# Altium PCB PCB1.PcbDoc (part 3 of 3)
Units mm, origin at the board's own origin, x right, y up, seen from the top; angles counter-clockwise.
Board outline 312.67 x 198.63 mm, 2 copper layers (Top Layer, Bottom Layer); 142 components, 324 nets, 969 pads, 386 vias.
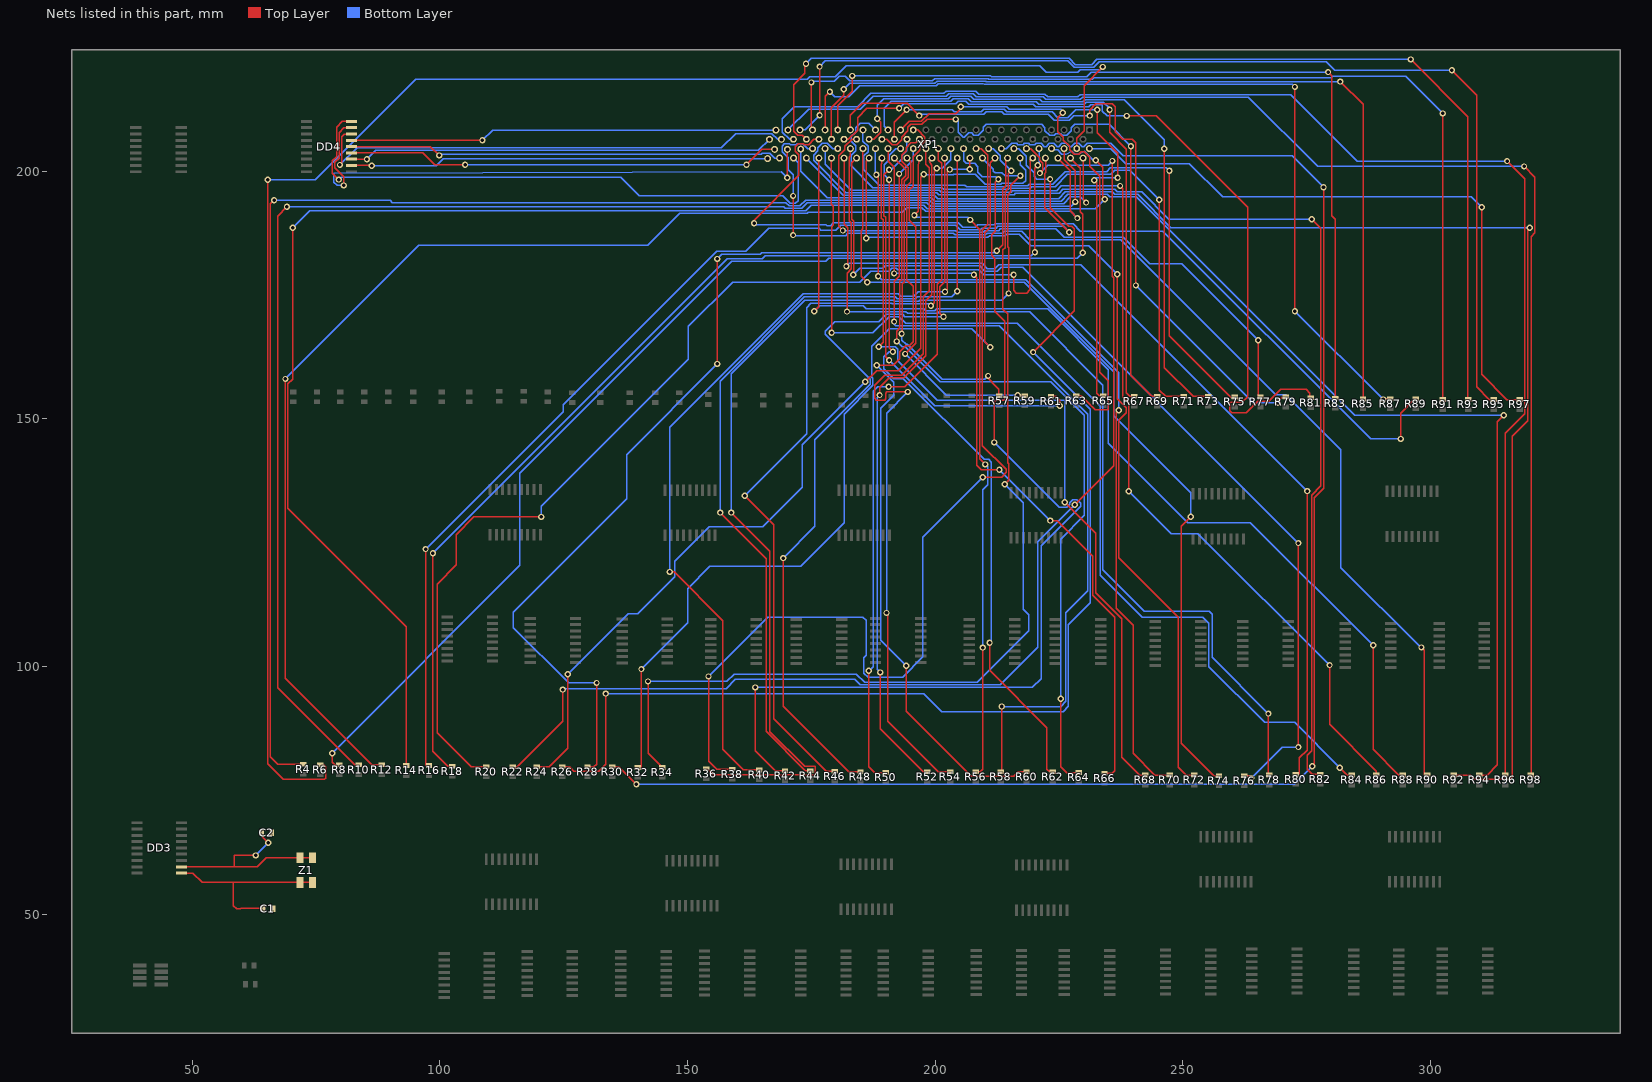
[diagram p3: the nets of this part, all layers, seen from the top]

## Via types
v1: diameter 1.27, hole 0.711, Top Layer to Bottom Layer, 386 vias

## Nets (pads, with @x,y where several pads share a name; then routed paths per layer and width w, separated by ;. In a path a pad name is that pad's centre, name@x,y a point inside that pad or via, vN(x,y) a via of type N, cw(c..) or ccw(c..) an arc to the next point about the centre after c; other vN are vias at no path point) (continued)
XP1-28: R57.2 XP1.28 | length 70.5
  Top Layer w0.254: v1(193.218,167.183) 193.391,167.356 193.391,177.305 193.714,177.628 193.714,197.938 194.556,198.78 194.556,200.677 193.218,202.016 193.218,203.225 194.107,204.114 194.107,204.749 195.09,205.733 196.107,205.733 XP1.28@196.837,206.462 ; v1(210.668,158.674) 210.16,158.674 212.801,156.032 212.801,154.67 R57.2@212.976,154.67
  Bottom Layer w0.254: v1(193.218,167.183) 193.218,165.927 194.109,165.036 194.377,165.036 201.422,157.991 209.985,157.991 v1(210.668,158.674)
XP1-29: R59.2 XP1.29 | length 77.1
  Top Layer w0.254: v1(193.925,163.116) 196.08,165.272 196.08,188.832 194.791,190.121 194.791,196.229 195.568,197.006 195.568,202.907 196.875,204.214 196.875,204.978 197.914,206.016 197.914,206.908 196.455,208.367 XP1.29@195.567,208.367 ; v1(216.687,154.788) 216.805,154.67 R59.2@218.056,154.67
  Bottom Layer w0.254: v1(193.925,163.116) 202.254,154.788 v1(216.687,154.788)
XP1-30: R61.2 XP1.30 | length 88.8
  Top Layer w0.254: v1(190.678,161.823) 189.992,162.509 189.992,190.729 189.662,191.059 189.662,199.314 v1(190.678,200.33) ; R61.2@223.39,154.543 224.358,154.543 225.171,153.73 v1(225.171,152.629)
  Bottom Layer w0.254: v1(190.678,161.823) 199.873,152.629 v1(225.171,152.629) ; v1(190.678,200.33) 191.16,200.33 193.22,202.389 193.22,203.098 194.297,204.175 XP1.30@194.297,206.462
XP1-31: R63.2 XP1.31 | length 109.8
  Top Layer w0.254: XP1.31@193.027,208.367 194.72,210.061 197.208,210.061 198.771,211.623 204.156,211.623 205.181,212.649 v1(205.181,213.033) ; v1(225.781,211.836) 224.765,210.82 224.765,207.997 225.854,206.908 225.854,206.273 227.124,205.003 227.124,204.368 228.078,203.414 228.966,203.414 229.515,203.962 230.073,203.962 231.214,202.821 231.214,200.988 233.197,199.005 233.197,159.436 234.975,157.658 234.975,151.816 232.343,151.816 229.489,154.67 R63.2@228.47,154.67
  Bottom Layer w0.254: v1(205.181,213.033) 214.411,213.033 214.941,212.504 225.327,212.504 225.781,212.05 v1(225.781,211.836)
XP1-32: R65.2 XP1.32 | length 112.2
  Top Layer w0.254: XP1.32@191.757,206.462 191.757,209.93 v1(194.222,212.395) ; v1(232.136,198.202) 232.664,197.674 232.664,155.178 233.172,154.67 R65.2@233.931,154.67 ; v1(232.715,212.395) 232.715,207.747 236.83,203.632 v1(236.83,198.679)
  Bottom Layer w0.254: v1(194.222,212.395) 203.406,212.395 203.821,211.98 209.306,211.98 209.855,212.529 213.907,212.529 214.437,211.999 223.593,211.999 224.769,210.824 226.793,210.824 228.363,212.395 v1(232.715,212.395) ; v1(232.136,198.202) 232.613,198.679 v1(236.83,198.679)
XP1-33: R67.2 XP1.33 | length 112.9
  Top Layer w0.254: v1(235.204,212.42) 235.204,207.831 238.574,204.46 238.574,155.237 239.268,154.543 R67.2@240.154,154.543
  Bottom Layer w0.254: XP1.33@190.487,208.367 189.717,209.137 189.717,212.75 191.109,214.143 203.135,214.143 203.665,214.673 206.697,214.673 207.31,214.06 220.41,214.06 220.958,213.512 230.062,213.512 230.511,213.96 233.965,213.96 235.204,212.721 v1(235.204,212.42)
XP1-34: R69.2 XP1.34 | length 116
  Top Layer w0.254: XP1.34@189.217,206.462 190.233,206.462 191.31,205.385 192.203,205.385 193.22,206.402 193.22,206.908 194.49,208.178 194.49,208.862 195.072,209.444 197.328,209.444 198.349,210.464 v1(204.165,210.464) ; v1(239.522,205.029) 239.522,158.775 243.754,154.543 R69.2@244.853,154.543
  Bottom Layer w0.254: v1(204.165,210.464) 204.65,209.98 204.65,207.921 205.687,206.883 205.894,206.883 206.783,207.772 207.338,207.772 207.82,207.29 208.713,207.29 209.728,208.305 209.728,208.864 210.312,209.448 221.488,209.448 222.148,208.788 222.148,208.202 223.127,207.224 224.015,207.224 224.33,207.539 225.351,207.539 225.667,207.224 226.555,207.224 227.51,208.178 227.51,208.813 228.14,209.444 235.107,209.444 v1(239.522,205.029)
XP1-35: R71.2 XP1.35 | length 125.9
  Top Layer w0.254: v1(245.262,194.234) 245.262,155.804 246.523,154.543 R71.2@250.187,154.543
  Bottom Layer w0.254: XP1.35@187.947,208.367 186.586,209.728 184.883,209.728 183.944,208.788 183.944,207.921 183.06,207.037 183.06,206.016 183.944,205.132 183.944,204.111 183.058,203.225 183.058,201.066 187.441,196.683 201.352,196.683 201.681,196.354 214.796,196.354 215.025,196.582 219.241,196.582 219.542,196.884 224.204,196.884 226.714,199.394 235.419,199.394 236.224,200.199 239.297,200.199 v1(245.262,194.234)
XP1-36: R73.2 XP1.36 | length 128.7
  Top Layer w0.254: XP1.36@186.677,206.462 187.565,206.462 189.024,207.921 189.024,209.883 v1(188.29,210.617) ; v1(246.278,204.521) 246.278,160.35 252.086,154.543 R73.2@255.14,154.543
  Bottom Layer w0.254: v1(188.29,210.617) 188.29,213.36 189.599,214.669 202.653,214.669 203.161,215.177 207.201,215.177 207.814,214.564 221.116,214.564 221.664,214.016 229.812,214.016 230.26,214.464 238.149,214.464 246.278,206.334 v1(246.278,204.521)
XP1-37: R75.2 XP1.37 | length 125.5
  Top Layer w0.254: v1(247.294,200.101) 247.294,166.802 259.68,154.416 R75.2@260.474,154.416
  Bottom Layer w0.254: XP1.37@185.407,208.367 185.407,206.08 186.484,205.003 186.484,203.982 185.6,203.098 185.6,200.277 188.671,197.206 205.977,197.206 206.324,196.858 214.185,196.858 214.413,197.087 218.737,197.087 219.038,197.388 223.7,197.388 226.261,199.949 234.638,199.949 235.392,200.703 246.693,200.703 v1(247.294,200.101)
XP1-38: R77.2 XP1.38 | length 126.3
  Top Layer w0.254: v1(181.381,188.036) 180.52,188.898 180.52,203.098 181.788,204.366 181.788,205.001 183.248,206.462 XP1.38@184.137,206.462 ; v1(265.227,165.862) 265.227,154.416 R77.2@265.681,154.416
  Bottom Layer w0.254: v1(181.381,188.036) 181.393,188.024 204.191,188.024 204.57,187.646 209.618,187.646 209.997,188.024 212.852,188.024 213.172,188.344 224.38,188.344 226.041,186.684 237.928,186.684 243.281,181.331 249.758,181.331 v1(265.227,165.862)
XP1-39: R79.2 XP1.39 | length 141.4
  Top Layer w0.254: XP1.39@182.867,208.367 182.867,211.34 185.242,213.716 194.335,213.716 v1(196.799,211.252) ; v1(231.191,211.252) 231.191,212.344 232.461,213.614 235.712,213.614 236.351,212.975 236.351,208.005 237.848,206.508 239.776,206.508 240.538,205.746 v1(240.538,176.936) ; v1(269.215,153.238) 269.215,153.629 270.002,154.416 R79.2@270.761,154.416
  Bottom Layer w0.254: v1(196.799,211.252) 197.024,211.476 209.81,211.476 210.359,212.025 213.403,212.025 213.933,211.495 222.855,211.495 224.03,210.32 227.051,210.32 227.982,211.252 v1(231.191,211.252) ; v1(240.538,176.936) 264.236,153.238 v1(269.215,153.238)
XP1-40: R81.2 XP1.40 | length 160
  Top Layer w0.254: XP1.40@181.597,206.462 182.485,206.462 184.33,208.307 184.33,210.82 186.209,212.7 v1(192.71,212.7) ; v1(238.684,211.176) 244.678,211.176 263.119,192.735 263.119,154.508 261.925,153.314 259.436,153.314 259.436,151.613 259.842,151.206 262.788,151.206 265.125,153.543 267.335,153.543 269.748,155.956 274.879,155.956 275.666,155.169 275.666,154.289 R81.2@275.841,154.289
  Bottom Layer w0.254: v1(192.71,212.7) 193.649,213.639 204.169,213.639 204.699,214.169 206.193,214.169 206.806,213.556 219.762,213.556 220.311,213.008 231.015,213.008 231.418,213.411 233.655,213.411 233.727,213.339 233.727,212.145 234.696,211.176 v1(238.684,211.176)
XP1-41: R83.2 XP1.41 | length 175.1
  Top Layer w0.254: XP1.41@180.327,208.367 180.327,213.27 183.236,216.179 v1(183.236,219.253) ; v1(279.333,220.031) 280.086,219.278 280.086,191.008 280.822,190.271 280.822,154.162 R83.2@280.81,154.162
  Bottom Layer w0.254: v1(183.236,219.253) 211.19,219.253 211.338,219.104 230.632,219.104 231.558,220.031 v1(279.333,220.031)
XP1-42: R85.2 XP1.42 | length 178.1
  Top Layer w0.254: XP1.42@179.057,206.462 179.057,212.85 181.559,215.352 v1(181.559,216.586) ; v1(281.762,218.11) 286.385,213.487 286.385,154.035 R85.2@286.382,154.035
  Bottom Layer w0.254: v1(181.559,216.586) 182.71,217.737 199.957,217.737 200.422,218.201 210.226,218.201 210.33,218.096 232.199,218.096 232.212,218.11 v1(281.762,218.11)
XP1-43: R87.2 XP1.43 | length 175.7
  Top Layer w0.254: XP1.43@177.787,208.367 177.787,215.129 v1(178.74,216.082) ; v1(272.644,171.755) v1(272.644,217.018) ; v1(290.474,153.924) 290.585,154.035 R87.2@291.843,154.035
  Bottom Layer w0.254: v1(178.74,216.082) 179.756,215.066 182.571,215.066 184.738,217.233 200.176,217.233 200.641,217.697 209.722,217.697 209.867,217.552 272.109,217.552 v1(272.644,217.018) ; v1(272.644,171.755) v1(290.474,153.924)
XP1-44: R89.2 XP1.44 | length 184.1
  Top Layer w0.254: v1(163.424,189.484) 163.424,190.09 172.491,199.157 172.491,203.304 171.78,204.016 171.78,204.959 172.36,205.539 173.376,205.539 173.53,205.385 174.423,205.385 175.5,206.462 XP1.44@176.517,206.462 ; v1(294.005,145.948) 294.005,151.165 296.875,154.035 R89.2@297.05,154.035
  Bottom Layer w0.254: v1(163.424,189.484) 163.703,189.205 177.932,189.205 178.161,188.976 178.864,188.976 179.447,189.559 204.665,189.559 205.57,188.654 208.101,188.654 208.602,189.155 211.901,189.155 212.098,189.352 227.843,189.352 229.286,187.909 245.948,187.909 287.909,145.948 v1(294.005,145.948)
XP1-45: R91.2 XP1.45 | length 199.4
  Top Layer w0.254: v1(175.006,217.932) 174.981,217.907 174.981,208.633 XP1.45@175.247,208.367 ; v1(302.489,211.684) 302.489,153.908 R91.2@302.511,153.908
  Bottom Layer w0.254: v1(175.006,217.932) 175.232,218.158 179.588,218.158 180.588,219.157 181.864,219.157 182.78,218.241 199.453,218.241 199.918,218.705 210.73,218.705 210.834,218.6 231.695,218.6 232.021,218.927 279.929,218.927 280.154,219.151 295.021,219.151 v1(302.489,211.684)
XP1-46: R93.2 XP1.46 | length 215
  Top Layer w0.254: v1(173.914,221.717) 173.707,221.717 173.707,219.757 171.425,217.475 171.425,208.126 172.26,207.29 173.149,207.29 XP1.46@173.977,206.462 ; v1(296.045,222.572) 307.569,211.049 307.569,153.908 R93.2@307.591,153.908
  Bottom Layer w0.254: v1(173.914,221.717) 174.99,222.793 227.066,222.793 228.317,221.543 231.611,221.543 232.641,222.572 v1(296.045,222.572)
XP1-47: R95.2 XP1.47 | length 215.3
  Top Layer w0.254: v1(176.657,211.301) v1(176.657,221.132) ; v1(304.343,220.37) 309.321,215.392 309.321,156.489 311.903,153.908 R95.2@312.798,153.908
  Bottom Layer w0.254: XP1.47@172.707,208.367 173.723,208.367 v1(176.657,211.301) ; v1(176.657,221.132) 177.814,222.289 226.8,222.289 228.05,221.039 232.062,221.039 233.092,222.068 278.982,222.068 280.68,220.37 v1(304.343,220.37)
XP1-48: R97.2 XP1.49 | length 127.6
  Top Layer w0.254: v1(310.337,192.735) 310.337,158.988 315.417,153.908 R97.2@318.005,153.908
  Bottom Layer w0.254: XP1.49@231.127,204.557 235.465,204.557 238.473,201.549 251.308,201.549 258.039,194.818 308.254,194.818 v1(310.337,192.735)
XP1-49: R4.2 XP1.50 | length 295.4
  Top Layer w0.254: v1(66.497,194.132) 65.761,193.396 65.761,81.764 67.261,80.264 R4.2@72.393,80.264 ; XP1.50@229.857,202.652 229.857,194.298 v1(230.471,193.684)
  Bottom Layer w0.254: v1(66.497,194.132) 89.916,194.132 90.399,193.65 169.873,193.65 170.526,192.997 172.668,192.997 173.834,194.163 198.837,194.163 199.56,193.44 225.909,193.44 227.283,194.814 229.341,194.814 v1(230.471,193.684)
XP1-50: R6.2 XP1.51 | length 332.3
  Top Layer w0.254: v1(65.253,198.298) 65.253,80.366 68.402,77.216 76.657,77.216 76.911,77.47 76.911,79.756 76.53,80.137 R6.2@75.838,80.137 ; XP1.51@228.587,204.557 228.587,206.715 230.048,208.176 230.048,217.272 v1(233.832,221.056)
  Bottom Layer w0.254: v1(65.253,198.298) 74.803,198.298 95.072,218.567 174.117,218.567 174.65,219.1 179.818,219.1 181.999,221.281 221.086,221.281 222.402,219.964 228.752,219.964 229.323,220.535 233.311,220.535 v1(233.832,221.056)
XP1-51: R8.2 XP1.52 | length 227.9
  Top Layer w0.254: v1(78.232,82.474) 78.232,80.645 78.74,80.137 R8.2@79.632,80.137 ; XP1.52@227.317,202.652 229.319,200.649 229.319,191.803 229.819,191.303 v1(229.819,183.566)
  Bottom Layer w0.254: v1(78.232,82.474) 116.154,120.396 116.154,139.04 158.928,181.813 177.931,181.813 178.521,182.403 228.656,182.403 v1(229.819,183.566)
XP1-52: R10.2 XP1.53 | length 292.8
  Top Layer w0.254: v1(69.113,192.811) 67.208,190.906 67.208,95.733 82.804,80.137 R10.2@83.569,80.137 ; XP1.53@226.047,204.557 226.047,202.343 228.295,200.095 v1(228.295,193.802)
  Bottom Layer w0.254: v1(69.113,192.811) 169.425,192.811 169.744,192.493 173.014,192.493 174.18,193.659 198.333,193.659 199.056,192.936 227.429,192.936 v1(228.295,193.802)
XP1-53: R12.2 XP1.54 | length 276
  Top Layer w0.254: v1(68.809,158.064) 68.809,97.587 86.258,80.137 R12.2@88.268,80.137 ; XP1.54@224.777,202.652 227.283,200.145 227.283,191.996 v1(228.724,190.556)
  Bottom Layer w0.254: v1(68.809,158.064) 95.758,185.014 141.935,185.014 148.407,191.485 174.121,191.485 174.326,191.69 193.326,191.69 194.287,192.651 197.325,192.651 198.083,191.893 227.387,191.893 v1(228.724,190.556)
XP1-54: R14.2 XP1.55 | length 305.1
  Top Layer w0.254: v1(70.307,188.57) 70.307,158.039 69.317,157.048 69.317,132.004 93.243,108.077 93.243,80.01 R14.2@93.221,80.01 ; v1(232.435,202.209) 233.807,200.838 233.807,194.742 v1(234.213,194.335)
  Bottom Layer w0.254: v1(70.307,188.57) 73.727,191.989 173.838,191.989 175.004,193.155 197.714,193.155 198.437,192.432 232.31,192.432 v1(234.213,194.335) ; XP1.55@223.507,204.557 223.746,204.318 224.763,204.318 225.6,203.48 226.493,203.48 227.531,204.089 228.14,203.48 229.033,203.48 230.071,204.089 231.951,202.209 v1(232.435,202.209)
XP1-55: R16.2 XP1.56 | length 220.8
  Top Layer w0.254: v1(97.104,123.717) 97.104,80.01 R16.2@97.793,80.01 ; XP1.56@222.237,202.652 222.295,202.594 222.295,199.677 222.166,199.549 222.166,192.606 v1(227.076,187.696)
  Bottom Layer w0.254: v1(97.104,123.717) 124.856,151.469 124.856,152.872 155.854,183.871 161.773,183.871 166.387,188.485 176.554,188.485 176.919,188.12 179.951,188.12 180.886,189.055 204.169,189.055 205.074,188.15 209.114,188.15 209.493,188.528 212.282,188.528 212.602,188.848 225.923,188.848 v1(227.076,187.696)
XP1-56: R18.2 XP1.57 | length 213.1
  Top Layer w0.254: v1(98.577,122.86) 98.577,82.906 101.6,79.883 R18.2@102.492,79.883 ; v1(220.142,183.642) 220.142,200.609 v1(220.726,201.193)
  Bottom Layer w0.254: v1(98.577,122.86) 158.039,182.321 165.125,182.321 165.735,182.931 219.431,182.931 v1(220.142,183.642) ; v1(220.726,201.193) 220.967,201.434 XP1.57@220.967,204.557
XP1-57: R20.2 XP1.58 | length 228.8
  Top Layer w0.254: R20.2@109.366,79.74 106.29,79.74 99.416,86.614 99.416,116.637 103.302,120.523 103.302,126.644 106.858,130.2 v1(120.472,130.2) ; v1(215.824,179.121) 215.824,175.946 216.408,175.362 218.44,175.362 219.13,176.051 219.13,196.372 219.241,196.483 219.241,201.974 219.13,202.085 XP1.58@219.697,202.652
  Bottom Layer w0.254: v1(120.472,130.2) 120.472,132.334 150.165,162.027 150.165,168.656 159.11,177.601 184.791,177.601 187.022,179.832 190.703,179.832 191.258,180.387 192.18,180.387 192.46,180.107 208.817,180.107 209.804,179.121 v1(215.824,179.121)
XP1-58: R22.2 XP1.59 | length 248.1
  Top Layer w0.254: R22.2@114.684,79.74 115.605,79.74 124.816,88.951 v1(124.816,95.352) ; XP1.59@218.427,204.557 219.315,204.557 221.16,202.712 221.16,202.206 221.738,201.627 221.738,200.224 v1(221.158,199.644) ; v1(228.194,132.639) 236.042,140.487 236.042,178.462 235.739,178.765 235.739,202.033 v1(235.788,202.082)
  Bottom Layer w0.254: v1(124.816,95.352) 125.019,95.555 157.81,95.555 159.664,97.409 183.759,97.409 184.887,96.282 213.096,96.282 220.726,103.911 220.726,125.171 v1(228.194,132.639) ; v1(221.158,199.644) 222.707,201.193 234.899,201.193 v1(235.788,202.082)
XP1-59: R24.2 XP1.60 | length 190.3
  Top Layer w0.254: R24.2@119.51,79.74 122.107,79.74 125.832,83.464 v1(125.832,98.425) ; v1(185.903,157.48) 188.163,159.741 192.557,159.741 197.104,164.287 197.104,198.806 v1(197.688,199.39)
  Bottom Layer w0.254: v1(125.832,98.425) 138.024,110.617 139.979,110.617 147.447,118.085 147.447,121.234 154.407,128.194 165.176,128.194 173.152,136.169 173.152,144.729 v1(185.903,157.48) ; v1(197.688,199.39) 197.79,199.288 203.657,199.288 203.733,199.365 208.128,199.365 210.13,197.362 213.237,197.362 213.487,197.612 217.729,197.612 218.237,198.12 218.237,200.254 217.157,201.334 XP1.60@217.157,202.652
XP1-60: R26.2 XP1.61 | length 249.7
  Top Layer w0.254: R26.2@124.717,79.74 126.178,79.74 127.051,78.867 132.08,78.867 133.452,80.239 v1(133.452,94.539) ; v1(219.761,163.5) 228.092,171.831 228.092,188.341 227.584,188.849 226.924,188.849 223.19,192.583 v1(223.19,198.425)
  Bottom Layer w0.254: v1(133.452,94.539) 197.714,94.539 201.346,90.907 225.857,90.907 226.898,91.948 226.898,108.433 231.318,112.852 231.318,151.943 v1(219.761,163.5) ; XP1.61@215.887,204.557 216.903,204.557 218.415,203.046 218.415,201.244 219.953,199.705 219.953,198.943 220.472,198.425 v1(223.19,198.425)
XP1-61: R28.2 XP1.62 | length 208.1
  Top Layer w0.254: R28.2@129.797,79.74 131.099,79.74 131.623,80.264 v1(131.623,96.672) ; v1(155.981,161.087) v1(155.981,182.296) ; v1(212.446,183.972) 213.61,185.137 213.61,196.422 214.292,197.104 214.292,201.815 214.288,201.819 214.288,202.323 XP1.62@214.617,202.652
  Bottom Layer w0.254: v1(131.623,96.672) 125.984,96.672 114.808,107.848 114.808,110.947 137.693,133.833 137.693,142.799 v1(155.981,161.087) ; v1(155.981,182.296) 156.878,183.192 164.648,183.192 164.993,183.536 212.009,183.536 v1(212.446,183.972)
XP1-62: R30.2 XP1.63 | length 334
  Top Layer w0.254: R30.2@134.75,79.74 136.144,79.74 v1(139.684,76.2) ; v1(276.123,79.858) 276.511,80.245 276.511,134.097 278.409,135.996 v1(278.409,196.774)
  Bottom Layer w0.254: v1(139.684,76.2) 272.466,76.2 v1(276.123,79.858) ; XP1.63@213.347,204.557 214.363,204.557 215.44,205.634 216.461,205.634 216.71,205.385 217.731,205.385 217.98,205.634 218.873,205.634 219.122,205.385 220.143,205.385 220.392,205.634 221.413,205.634 222.069,204.978 222.404,204.978 223.06,205.634 223.953,205.634 224.609,204.978 224.944,204.978 225.6,205.634 226.493,205.634 227.149,204.978 227.484,204.978 228.14,205.634 229.033,205.634 229.689,204.978 230.024,204.978 230.685,205.638 235.445,205.638 237.993,203.09 272.093,203.09 v1(278.409,196.774)
XP1-63: R32.2 XP1.64 | length 182.5
  Top Layer w0.254: R32.2@139.957,79.613 140.691,79.613 v1(140.691,99.492) ; v1(211.138,164.44) 210.037,165.541 210.037,187.607 211.142,188.713 211.142,201.718 XP1.64@212.077,202.652
  Bottom Layer w0.254: v1(140.691,99.492) 150.012,108.814 150.012,115.748 154.508,120.244 172.822,120.244 181.635,129.057 181.635,150.972 187.427,156.763 187.427,158.193 187.198,158.421 187.198,164.694 190.703,168.199 207.379,168.199 v1(211.138,164.44)
XP1-64: R34.2 XP1.65 | length 204.4
  Top Layer w0.254: v1(142.011,96.977) 142.011,82.509 144.907,79.613 R34.2@144.91,79.613 ; v1(214.071,136.804) 214.901,137.635 214.901,140.894 214.655,141.14 214.655,171.196 213.665,172.187 213.665,184.125 214.114,184.574 214.114,195.91 214.796,196.592 214.796,199.531 v1(215.341,200.076)
  Bottom Layer w0.254: v1(142.011,96.977) 157.937,96.977 159.41,98.45 184.063,98.45 185.727,96.786 208.52,96.786 218.923,107.188 218.923,110.414 217.78,111.557 217.78,133.096 v1(214.071,136.804) ; XP1.65@210.807,204.557 211.695,204.557 213.154,203.098 213.154,202.263 v1(215.341,200.076)
XP1-65: R36.2 XP1.66 | length 209
  Top Layer w0.254: R36.2@153.816,79.359 154,79.359 155.254,78.105 175.782,78.105 175.782,79.832 173.663,79.832 166.624,86.872 166.624,123.266 v1(158.801,131.089) ; v1(214.808,175.336) 214.808,184.541 214.618,184.73 214.618,195.168 215.3,195.85 215.3,197.143 v1(217.221,199.064)
  Bottom Layer w0.254: v1(158.801,131.089) 158.801,159.106 173.685,173.99 191.609,173.99 191.879,173.719 196.657,173.719 196.928,173.99 213.462,173.99 v1(214.808,175.336) ; XP1.66@209.537,202.652 211.76,200.429 211.76,200.028 212.09,199.698 213.476,199.698 214.11,199.064 v1(217.221,199.064)
XP1-66: R38.2 XP1.67 | length 200.4
  Top Layer w0.254: v1(154.229,97.993) 154.229,80.848 155.845,79.232 R38.2@159.007,79.232 ; XP1.67@208.267,204.557 209.283,204.557 210.638,203.202 210.638,189.321 209.533,188.216 209.533,144.62 214.372,139.78 214.372,139.192 213.407,138.227 v1(209.626,138.227)
  Bottom Layer w0.254: v1(154.229,97.993) 166.218,109.982 185.42,109.982 186.106,109.296 186.106,102.307 185.602,101.803 185.602,98.632 186.44,97.794 193.4,97.794 197.536,101.93 197.536,126.136 v1(209.626,138.227)
XP1-67: R40.2 XP1.68 | length 177.7
  Top Layer w0.254: v1(146.431,119.101) 147.269,119.101 157.099,109.271 157.099,83.271 161.265,79.105 R40.2@164.468,79.105 ; v1(201.981,175.692) 202.438,176.149 202.438,199.873 v1(202.921,200.355) ; v1(206.997,200.406) XP1.68@206.997,202.652
  Bottom Layer w0.254: v1(146.431,119.101) 146.431,148.285 173.381,175.235 192.532,175.235 193.04,174.727 195.641,174.727 196.605,175.692 v1(201.981,175.692) ; v1(202.921,200.355) 202.971,200.406 v1(206.997,200.406)
XP1-68: R42.2 XP1.69 | length 210.1
  Top Layer w0.254: v1(163.652,95.778) 163.652,82.982 167.656,78.978 R42.2@169.675,78.978 ; v1(211.938,145.237) 211.938,153.416 212.319,153.797 214.02,153.797 214.02,169.748 212.07,171.699 212.07,182.314 211.39,182.994 211.39,187.154 212.15,187.915 212.15,197.749 v1(212.776,198.374)
  Bottom Layer w0.254: v1(163.652,95.778) 219.628,95.778 221.386,97.536 221.386,124.392 229.362,132.367 229.362,132.918 228.6,133.68 227.736,133.68 227.152,133.096 227.152,132.719 226.568,132.135 225.04,132.135 v1(211.938,145.237) ; XP1.69@205.727,204.557 205.727,202.096 206.248,201.575 207.956,201.575 208.589,200.942 208.589,199.751 209.458,198.882 212.268,198.882 v1(212.776,198.374)
XP1-69: R44.2 XP1.70 | length 169.3
  Top Layer w0.254: v1(156.591,131.089) 165.887,121.793 165.887,86.893 173.803,78.978 R44.2@174.755,78.978 ; v1(204.457,175.78) XP1.70@204.457,202.652
  Bottom Layer w0.254: v1(156.591,131.089) 156.591,157.645 173.571,174.625 191.982,174.625 192.383,174.223 196.022,174.223 196.424,174.625 203.302,174.625 v1(204.457,175.78)
XP1-70: R46.2 XP1.71 | length 167.1
  Top Layer w0.254: v1(161.519,134.493) 167.361,128.651 167.361,89.448 177.958,78.851 R46.2@179.708,78.851 ; v1(199.136,172.847) 199.785,173.496 199.785,200.043 v1(200.325,200.584)
  Bottom Layer w0.254: v1(161.519,134.493) 174.037,147.011 174.037,172.482 174.91,173.355 191.235,173.355 191.375,173.215 198.768,173.215 v1(199.136,172.847) ; v1(200.325,200.584) 201.397,200.584 203.187,202.374 XP1.71@203.187,204.557
XP1-71: R48.2 XP1.72 | length 166.1
  Top Layer w0.254: v1(169.342,121.895) 169.342,91.957 182.575,78.724 R48.2@184.915,78.724 ; v1(201.676,170.612) 200.969,171.319 200.969,176.708 201.905,177.644 201.905,201.371 XP1.72@201.917,202.652
  Bottom Layer w0.254: v1(169.342,121.895) 175.717,128.27 175.717,145.767 186.919,156.968 186.919,157.988 177.8,167.107 177.8,167.665 179.73,169.596 188.589,169.596 190.156,171.163 193.404,171.163 193.904,170.663 201.625,170.663 v1(201.676,170.612)
XP1-72: R50.2 XP1.73 | length 138.3
  Top Layer w0.254: v1(186.614,99.136) 186.614,79.756 187.773,78.597 R50.2@189.995,78.597 ; v1(190.576,156.464) 193.837,156.464 200.465,163.092 200.465,177.214 201.337,178.086 201.337,201.58 200.647,202.27 XP1.73@200.647,204.557
  Bottom Layer w0.254: v1(186.614,99.136) 187.452,99.974 187.452,155.563 188.353,156.464 v1(190.576,156.464)
XP1-73: R52.2 XP1.74 | length 135.2
  Top Layer w0.254: v1(188.773,154.813) 188.773,156.337 190.735,158.299 193.656,158.299 198.124,162.767 198.124,173.868 199.28,175.025 199.28,201.236 198.772,202.048 XP1.74@199.377,202.652 ; v1(188.9,98.806) 188.9,87.436 197.612,78.724 R52.2@198.377,78.724
  Bottom Layer w0.254: v1(188.773,154.813) 188.265,154.305 188.265,99.441 v1(188.9,98.806)
XP1-74: R54.2 XP1.75 | length 150.7
  Top Layer w0.254: v1(190.17,110.82) 190.424,110.566 190.424,88.935 200.635,78.724 R54.2@203.076,78.724 ; v1(194.462,155.448) 190.26,155.448 190.006,155.194 190.006,154.022 189.785,153.801 188.138,153.801 187.761,154.178 187.761,156.746 189.822,158.807 193.251,158.807 197.62,163.175 197.62,174.698 198.776,175.855 198.776,200.732 198.107,201.402 XP1.75@198.107,204.557
  Bottom Layer w0.254: v1(190.17,110.82) 190.17,151.155 v1(194.462,155.448)
XP1-75: R56.2 XP1.76 | length 138
  Top Layer w0.254: v1(195.809,191.135) 196.576,191.903 196.576,201.224 XP1.76@196.837,202.652 ; v1(207.086,190.17) 209.017,188.239 209.017,141.91 v1(210.134,140.792) ; R56.2@208.156,78.724 209.102,78.724 209.626,79.248 v1(209.626,103.835)
  Bottom Layer w0.254: v1(195.809,191.135) 196.266,190.678 206.578,190.678 v1(207.086,190.17) ; v1(209.626,103.835) 209.626,135.687 210.642,136.703 210.642,140.284 v1(210.134,140.792)
XP1-76: R58.2 XP1.77 | length 170.3
  Top Layer w0.254: v1(191.694,169.647) 191.694,177.8 192.706,178.812 v1(192.706,199.462) ; R58.2@213.236,78.724 213.462,78.724 v1(213.462,91.923)
  Bottom Layer w0.254: v1(191.694,169.647) 191.694,169.105 192.024,168.775 212.959,168.775 230.79,150.944 230.79,115.296 226.39,110.896 226.39,92.96 225.353,91.923 v1(213.462,91.923) ; v1(192.706,199.462) 195.567,202.323 XP1.77@195.567,204.557
XP1-77: R60.2 XP1.78 | length 153
  Top Layer w0.254: v1(188.214,160.811) 191.499,160.811 192.828,162.14 192.828,163.576 194.018,164.765 194.733,164.765 195.576,165.608 195.576,176.739 194.287,178.028 194.287,196.999 195.064,197.776 195.064,201.885 XP1.78@194.297,202.652 ; v1(194.132,100.152) 194.132,90.957 207.264,77.826 215.891,77.826 216.789,78.724 R60.2@218.443,78.724
  Bottom Layer w0.254: v1(188.214,160.811) 191.592,157.433 191.592,154.813 188.976,152.197 188.976,105.308 v1(194.132,100.152)
XP1-78: R62.2 XP1.79 | length 146.3
  Top Layer w0.254: v1(190.68,198.304) 190.68,164.362 v1(191.465,163.576) ; v1(210.972,104.826) 210.972,99.263 222.571,87.665 222.571,79.248 223.095,78.724 R62.2@223.777,78.724
  Bottom Layer w0.254: v1(190.68,198.304) 189.666,199.318 189.666,201.345 190.68,202.359 190.68,203.227 192.01,204.557 XP1.79@193.027,204.557 ; v1(191.465,163.576) 190.678,163.576 189.662,162.56 189.662,160.094 191.629,158.127 193.562,158.127 209.884,141.804 210.82,141.804 211.368,141.256 211.368,105.221 v1(210.972,104.826)
XP1-79: R64.2 XP1.80 | length 159.8
  Top Layer w0.254: XP1.80@191.757,202.652 194.052,200.357 194.052,199.115 193.21,198.272 193.21,178.132 192.887,177.809 192.887,168.372 192.206,167.691 192.206,165.655 v1(192.227,165.633) ; v1(225.374,93.497) 225.374,79.791 226.568,78.597 R64.2@228.984,78.597
  Bottom Layer w0.254: v1(192.227,165.633) 193.324,164.537 193.984,164.537 201.034,157.487 223.357,157.487 230.141,150.702 230.141,130.496 225.374,125.729 v1(225.374,93.497)
XP1-80: R66.2 XP1.81 | length 159
  Top Layer w0.254: XP1.81@190.487,204.557 190.487,202.027 191.694,200.82 v1(191.694,179.375) ; v1(207.823,179.095) 208.432,178.486 208.432,140.589 209.296,139.725 v1(212.979,139.725) ; v1(223.241,129.464) 224.663,129.464 231.822,122.305 231.822,114.367 236.22,109.969 236.22,78.978 235.712,78.47 R66.2@234.191,78.47
  Bottom Layer w0.254: v1(191.694,179.375) 207.543,179.375 v1(207.823,179.095) ; v1(212.979,139.725) v1(223.241,129.464)
XP1-81: R68.2 XP1.82 | length 165
  Top Layer w0.254: v1(188.62,164.592) 189.48,165.452 189.48,190.221 189.154,190.547 189.154,201.498 189.217,201.561 XP1.82@189.217,202.652 ; v1(226.136,133.147) 232.422,126.861 232.422,114.936 237.693,109.664 237.693,81.716 241.32,78.089 R68.2@242.446,78.089
  Bottom Layer w0.254: v1(188.62,164.592) 191.973,164.592 192.481,164.084 192.481,161.747 200.453,153.776 226.056,153.776 226.187,153.645 226.187,133.198 v1(226.136,133.147)
XP1-82: R70.2 XP1.83 | length 170.3
  Top Layer w0.254: v1(188.138,199.302) 188.468,198.972 v1(188.468,178.816) ; v1(237.058,151.714) 236.546,151.202 236.546,111.713 239.979,108.28 239.979,82.458 244.348,78.089 R70.2@247.399,78.089
  Bottom Layer w0.254: XP1.83@187.947,204.557 187.947,199.493 v1(188.138,199.302) ; v1(188.468,178.816) 189.205,178.079 218.262,178.079 237.058,159.283 v1(237.058,151.714)
XP1-83: R72.2 XP1.84 | length 180.6
  Top Layer w0.254: v1(186.08,186.461) 186.08,202.056 XP1.84@186.677,202.652 ; v1(236.753,179.222) 236.753,154.043 238.578,152.218 238.578,151.201 237.05,149.673 237.05,122.004 249.094,109.961 249.094,79.642 250.647,78.089 R72.2@252.352,78.089
  Bottom Layer w0.254: v1(186.08,186.461) 186.257,186.638 210.618,186.638 210.997,187.016 214.114,187.016 214.343,187.245 216.963,187.245 219.27,184.937 231.038,184.937 v1(236.753,179.222)
XP1-84: R74.2 XP1.85 | length 177.5
  Top Layer w0.254: XP1.85@185.407,204.557 185.407,188.378 185.064,188.036 185.064,178.791 v1(186.283,177.572) ; v1(251.612,130.26) 249.682,128.329 249.682,84.541 256.261,77.962 R74.2@257.305,77.962
  Bottom Layer w0.254: v1(186.283,177.572) 218.031,177.572 236.042,159.561 236.042,150.622 251.612,135.052 v1(251.612,130.26)
XP1-85: R76.2 XP1.86 | length 193.6
  Top Layer w0.254: v1(183.439,179.121) 183.599,179.281 183.599,189.859 183.178,190.28 183.178,201.693 XP1.86@184.137,202.652 ; R76.2@262.385,77.962 263.338,77.962 v1(263.83,77.47) ; v1(273.355,83.744) v1(273.355,124.917)
  Bottom Layer w0.254: v1(183.439,179.121) 184.728,180.41 189.438,180.41 189.919,180.891 208.991,180.891 210.045,179.836 212.574,179.836 213.349,180.611 217.661,180.611 v1(273.355,124.917) ; v1(263.83,77.47) 270.104,83.744 v1(273.355,83.744)
XP1-86: R78.2 XP1.87 | length 192.1
  Top Layer w0.254: v1(182.194,171.679) 182.194,179.426 183.095,180.327 183.095,189.56 182.674,189.982 182.674,202.844 182.867,203.037 XP1.87@182.867,204.557 ; v1(267.284,90.5) 267.284,78.089 R78.2@267.465,78.089
  Bottom Layer w0.254: v1(182.194,171.679) 194.056,171.679 194.412,171.323 200.508,171.323 200.812,171.628 219.065,171.628 233.858,156.835 233.858,119.532 242.214,111.176 255.372,111.176 255.956,110.592 255.956,101.829 v1(267.284,90.5)
XP1-87: R80.2 XP1.88 | length 193.8
  Top Layer w0.254: XP1.88@181.597,202.652 181.597,189.345 182.393,188.548 182.393,181.158 v1(182.083,180.848) ; R80.2@272.799,78.216 273.551,78.216 273.551,81.549 275.107,83.105 v1(275.107,135.433)
  Bottom Layer w0.254: v1(182.083,180.848) 182.63,181.395 209.499,181.395 210.553,180.34 212.07,180.34 212.845,181.116 229.425,181.116 v1(275.107,135.433)
XP1-88: R82.2 XP1.89 | length 230.2
  Top Layer w0.254: v1(276.047,190.322) 277.901,188.468 277.901,136.453 276.007,134.558 276.007,82.992 275.111,82.097 275.111,79.248 276.143,78.216 R82.2@277.752,78.216
  Bottom Layer w0.254: XP1.89@180.327,204.557 179.31,204.557 178.233,205.634 177.212,205.634 176.327,204.749 176.327,204.114 175.438,203.225 175.438,202.184 181.946,195.675 200.343,195.675 200.716,195.303 215.943,195.303 216.214,195.574 225.019,195.574 225.8,196.356 236.298,196.356 236.8,195.854 241.661,195.854 247.193,190.322 v1(276.047,190.322)
XP1-89: R84.2 XP1.90 | length 205.5
  Top Layer w0.254: XP1.90@179.057,202.652 179.057,193.358 179.451,192.964 179.451,189.154 179.07,188.773 v1(179.07,167.386) ; v1(281.711,79.578) 283.201,78.089 R84.2@284.118,78.089
  Bottom Layer w0.254: v1(179.07,167.386) 187.405,167.386 190.678,170.659 192.688,170.659 194.056,169.291 216.611,169.291 233.35,152.552 233.35,118.389 241.808,109.931 254,109.931 255.219,108.712 255.219,100 266.522,88.697 272.593,88.697 v1(281.711,79.578)
XP1-90: R86.2 XP1.91 | length 209.1
  Top Layer w0.254: v1(237.322,197.044) 237.856,196.509 237.856,154.456 239.082,153.23 v1(239.082,135.415) ; v1(279.629,100.285) 279.629,88.341 289.077,78.892 289.077,78.089 R86.2@289.055,78.089
  Bottom Layer w0.254: XP1.91@177.787,204.557 177.787,201.435 183.043,196.179 200.848,196.179 201.22,195.807 215.313,195.807 215.584,196.078 224.511,196.078 225.476,197.044 v1(237.322,197.044) ; v1(239.082,135.415) 247.649,126.848 253.066,126.848 v1(279.629,100.285)
XP1-91: R88.2 XP1.92 | length 211.2
  Top Layer w0.254: v1(175.565,171.704) 176.517,172.656 XP1.92@176.517,202.652 ; v1(288.442,104.267) 288.442,83.271 293.624,78.089 R88.2@294.389,78.089
  Bottom Layer w0.254: v1(175.565,171.704) 176.657,172.796 185.445,172.796 186.03,172.212 197.739,172.212 198.12,171.831 199.949,171.831 200.33,172.212 222.679,172.212 234.95,159.941 234.95,145.059 250.952,129.057 263.652,129.057 v1(288.442,104.267)
XP1-92: R90.2 XP1.93 | length 228.7
  Top Layer w0.254: v1(171.298,187.122) v1(171.298,195.021) ; v1(298.175,103.856) 298.704,103.326 298.704,78.089 R90.2@299.342,78.089
  Bottom Layer w0.254: v1(171.298,187.122) 171.395,187.024 181.893,187.024 182.39,187.52 203.687,187.52 204.066,187.142 210.114,187.142 210.493,187.52 213.61,187.52 213.93,187.84 217.467,187.84 219.127,186.18 237.442,186.18 268.759,154.863 270.777,154.863 281.889,143.75 281.889,119.964 297.998,103.856 v1(298.175,103.856) ; v1(171.298,195.021) 171.298,199.314 170.307,200.304 170.307,202.744 169.078,203.973 169.078,205.07 169.519,205.511 170.637,205.511 170.764,205.384 171.956,205.384 172.11,205.539 173.303,205.539 174.285,204.557 XP1.93@175.247,204.557
XP1-93: R92.2 XP1.94 | length 277.9
  Top Layer w0.254: R92.2@304.676,78.089 307.991,78.089 308.864,77.216 316.128,77.216 316.56,77.648 316.56,146.456 319.684,149.581 319.684,188.214 v1(320.065,188.595)
  Bottom Layer w0.254: XP1.94@173.977,202.652 181.457,195.171 199.839,195.171 200.563,194.448 224.901,194.448 226.304,195.851 235.794,195.851 236.296,195.35 240.856,195.35 247.61,188.595 v1(320.065,188.595)
XP-94: R94.2 XP1.95 | length 243.5
  Top Layer w0.254: R94.2@309.883,78.089 311.429,78.089 313.487,80.146 313.487,149.454 v1(314.782,150.749)
  Bottom Layer w0.254: XP1.95@172.857,204.462 172.857,200 178.189,194.667 199.238,194.667 199.961,193.944 225.405,193.944 226.808,195.347 234.72,195.347 235.221,194.846 240.612,194.846 284.709,150.749 v1(314.782,150.749)
XP-95: R96.2 XP1.96 | length 287.5
  Top Layer w0.254: R96.2@315.09,78.089 315.112,78.089 315.112,147.117 319.049,151.054 319.049,198.476 v1(315.468,202.057)
  Bottom Layer w0.254: XP1.96@171.357,206.462 170.602,206.462 169.164,207.9 169.164,210.642 171.567,213.046 184.321,213.046 186.992,215.716 201.715,215.716 202.184,216.185 208.209,216.185 208.822,215.572 222.141,215.572 222.69,215.024 228.804,215.024 229.252,215.472 271.776,215.472 285.191,202.057 v1(315.468,202.057)
XP-96: R98.2 XP1.97 | length 282.3
  Top Layer w0.254: v1(318.897,200.965) 321.077,198.784 321.077,187.583 320.319,186.825 320.319,78.089 R98.2@320.297,78.089
  Bottom Layer w0.254: XP1.97@170.256,208.331 174.467,212.542 184.825,212.542 187.461,215.177 202.188,215.177 202.692,215.681 207.705,215.681 208.318,215.068 221.783,215.068 222.331,214.52 229.308,214.52 229.756,214.968 263.263,214.968 277.266,200.965 v1(318.897,200.965)
XP-97: DD4.18 XP1.98 | length 119.3
  Top Layer w0.254: v1(79.578,198.323) 78.291,199.611 78.291,202.073 79.117,202.899 79.117,208.911 80.264,210.058 DD4.18@82.147,210.058
  Bottom Layer w0.254: v1(79.578,198.323) 80.086,198.831 136.525,198.831 140.259,195.097 169.189,195.097 170.764,193.523 171.78,193.523 172.314,194.056 172.314,201.752 XP1.98@171.399,202.667
XP-98: DD4.17 XP1.99 | length 116.6
  Top Layer w0.254: v1(80.594,197.129) 80.594,198.861 78.795,200.66 78.795,201.807 79.621,202.633 79.621,207.789 80.62,208.788 DD4.17@82.147,208.788 ; v1(170.155,198.704) XP1.99@170.155,204.419
  Bottom Layer w0.254: v1(80.594,197.129) 79.248,197.129 78.562,197.815 78.562,199.644 168.961,199.898 v1(170.155,198.704)
XP-99: DD4.16 XP1.100 | length 100.3
  Top Layer w0.254: v1(79.807,201.27) 80.125,201.588 80.125,206.973 80.67,207.518 DD4.16@82.147,207.518
  Bottom Layer w0.254: v1(79.807,201.27) 83.261,204.724 156.794,204.724 159.69,207.62 167.006,207.62 168.174,206.451 XP1.100@168.935,206.451
XP-100: DD4.15 XP1.101 | length 86.5
  Top Layer w0.254: DD4.15@82.147,206.248 v1(108.585,206.248)
  Bottom Layer w0.254: v1(108.585,206.248) 110.642,208.305 XP1.101@167.843,208.305
XP-101: DD4.14 XP1.102 | length 87.8
  Top Layer w0.254: DD4.14@82.147,204.978 98.069,204.978 v1(99.847,203.2)
  Bottom Layer w0.254: v1(99.847,203.2) 100.051,203.403 164.887,203.403 165.125,203.642 166.613,203.642 167.588,202.667 XP1.102@168.605,202.667
XP-102: DD4.13 XP1.103 | length 87.7
  Top Layer w0.254: DD4.13@82.147,203.708 96.545,203.708 98.958,201.295 v1(105.08,201.295) ; v1(161.9,201.295) 165.024,204.419 XP1.103@167.589,204.419
  Bottom Layer w0.254: v1(105.08,201.295) v1(161.9,201.295)
XP-103: DD4.12 XP1.104 | length 86.1
  Top Layer w0.254: DD4.12@82.147,202.438 v1(85.268,202.438)
  Bottom Layer w0.254: v1(85.268,202.438) 87.046,204.216 164.313,204.216 XP1.104@166.548,206.451
XP-104: DD4.11 XP1.105 | length 84.6
  Top Layer w0.254: DD4.11@82.147,201.168 86.208,201.168 v1(86.258,201.117)
  Bottom Layer w0.254: v1(86.258,201.117) 99.212,201.117 100.66,202.565 XP1.105@166.167,202.565
Z-1: DD3.10 Z1.3 Z1.5 С1.1 | length 38.4
  Top Layer w0.254: DD3.10@47.785,58.293 50.063,58.293 51.968,56.388 58.293,56.388 ; С1.1@64.281,51.054 64.281,51.156 59.821,51.156 59.821,51.054 58.928,51.054 58.293,51.689 58.293,56.388 ; Z1.5@74.258,56.388 Z1.3@71.758,56.388 58.293,56.388
Z-2: DD3.11 Z1.4 Z1.6 С2.1 | length 40.1
  Top Layer w0.254: DD3.11@47.785,59.563 58.42,59.563 ; v1(62.789,61.849) 58.42,61.849 58.42,59.563 ; С2.1@64.027,66.421 64.027,65.691 v1(65.329,64.389) ; Z1.6@74.258,61.388 Z1.4@71.758,61.388 71.758,61.366 64.948,61.366 63.144,59.563 58.42,59.563
  Bottom Layer w0.254: v1(62.789,61.849) v1(65.329,64.389)
С1-1: 
С1-2: С1.2
С2-1: 
С2-2: С2.2
pads on no net: DD1.7 DD3.4 DD3.7 DD3.8 DD5.3 DD5.4 DD5.5 DD5.6 DD5.7 DD5.8 DD5.9 DD5.10 DD5.16 DD6.3 DD6.4 DD6.5 DD6.6 DD6.7 DD6.8 DD6.9 DD6.10 DD6.16 DD9.3 DD9.4 DD9.5 DD9.6 DD9.7 DD9.8 DD9.9 DD9.10 DD9.15 DD9.16 DD10.3 DD10.4 DD10.5 DD10.6 DD10.7 DD10.8 DD10.9 DD10.10 DD10.15 DD10.16 DD11.3 DD11.4 DD11.5 DD11.6 DD11.7 DD11.8 DD11.9 DD11.10 DD11.16 DD12.3 DD12.4 DD12.5 DD12.6 DD12.7 DD12.8 DD12.9 DD12.10 DD12.16 DD15.3 DD15.4 DD15.5 DD15.6 DD15.7 DD15.8 DD15.9 DD15.10 DD15.16 DD16.3 DD16.4 DD16.5 DD16.6 DD16.7 DD16.8 DD16.9 DD16.10 DD16.16 DD17.3 DD17.4 DD17.5 DD17.6 DD17.7 DD17.8 DD17.9 DD17.10 DD17.16 DD18.3 DD18.4 DD18.5 DD18.6 DD18.7 DD18.8 DD18.9 DD18.10 DD18.16 DD21.3 DD21.4 DD21.5 DD21.6 DD21.7 DD21.8 DD21.9 DD21.10 DD21.15 DD21.16 DD22.3 DD22.4 DD22.5 DD22.6 DD22.7 DD22.8 DD22.9 DD22.10 DD22.15 DD22.16 DD23.3 DD23.4 DD23.5 DD23.6 DD23.7 DD23.8 DD23.9 DD23.10 DD23.16 DD24.3 DD24.4 DD24.5 DD24.6 DD24.7 DD24.8 DD24.9 DD24.10 DD24.16 DD27.3 DD27.4 DD27.5 DD27.6 DD27.7 DD27.8 DD27.9 DD27.10 DD27.15 DD27.16 DD28.3 DD28.4 DD28.5 DD28.6 DD28.7 DD28.8 DD28.9 DD28.10 DD28.15 DD28.16 DD29.3 DD29.4 DD29.5 DD29.6 DD29.7 DD29.8 DD29.9 DD29.10 DD29.16 DD30.3 DD30.4 DD30.5 DD30.6 DD30.7 DD30.8 DD30.9 DD30.10 DD30.16 DD33.3 DD33.4 DD33.5 DD33.6 DD33.7 DD33.8 DD33.9 DD33.10 DD33.16 DD34.3 DD34.4 DD34.5 DD34.6 DD34.7 DD34.8 DD34.9 DD34.10 DD34.16 DD35.3 DD35.4 DD35.5 DD35.6 DD35.7 DD35.8 DD35.9 DD35.10 DD35.16 DD36.3 DD36.4 DD36.5 DD36.6 DD36.7 DD36.8 DD36.9 DD36.10 DD36.16 DD39.3 DD39.4 DD39.5 DD39.6 DD39.7 DD39.8 DD39.9 DD39.10 DD39.15 DD39.16 DD40.3 DD40.4 DD40.5 DD40.6 DD40.7 DD40.8 DD40.9 DD40.10 DD40.15 DD40.16 R1.1 R2.2
copper on no net: | length 1022.6
  Top Layer w0.254: 25.654,25.908 338.328,25.908 338.328,224.536 25.654,224.536 25.654,25.908

## Text inside footprints (layer, text, board x,y; h text height)
XP1: Top Overlay "43" at 177.8,210.693 h1.5; Top Overlay "1" at 230.759,210.312 h1.5; Top Overlay "46" at 229.235,199.517 h1.5; Top Overlay "92" at 170.053,199.898 h1.5